# Altium PCB PCB1.PcbDoc (part 1 of 2)
Units mm, origin at the board's own origin, x right, y up, seen from the top; angles counter-clockwise.
Board outline 61.72 x 101.6 mm, 2 copper layers (Top Layer, Bottom Layer); 108 components, 60 nets, 357 pads, 84 vias.
Unrouted connection lines stored in the file: 20.
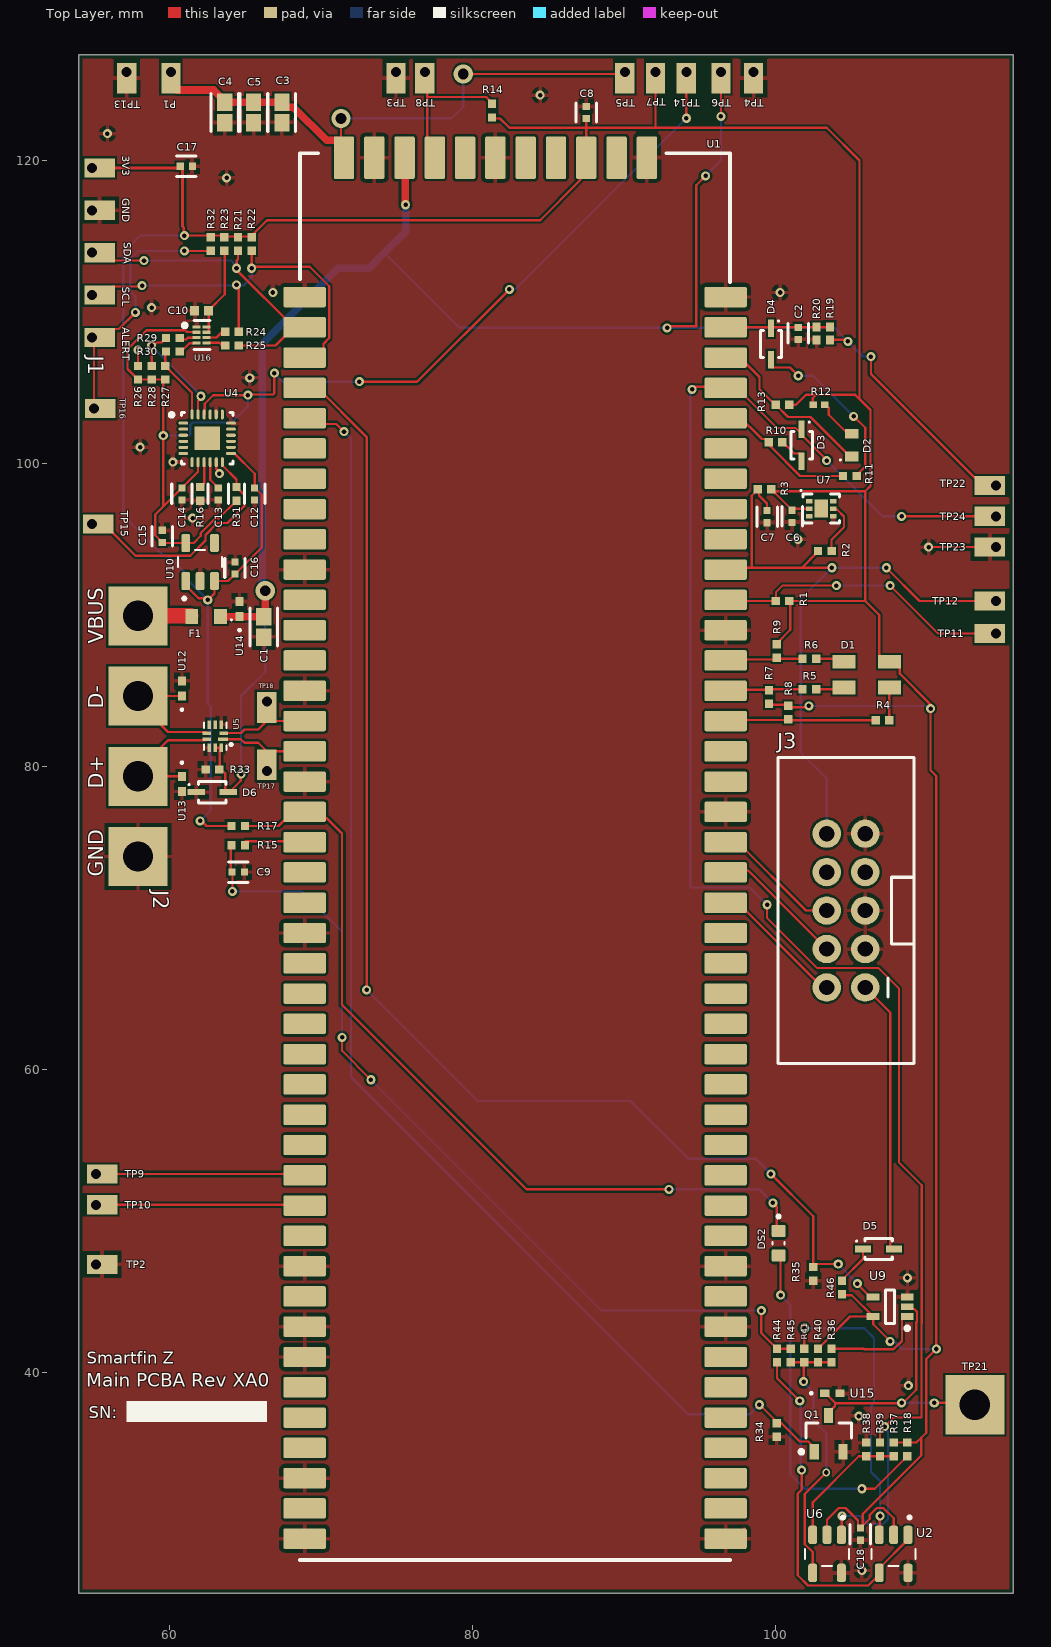
[diagram p0: Top Layer view]
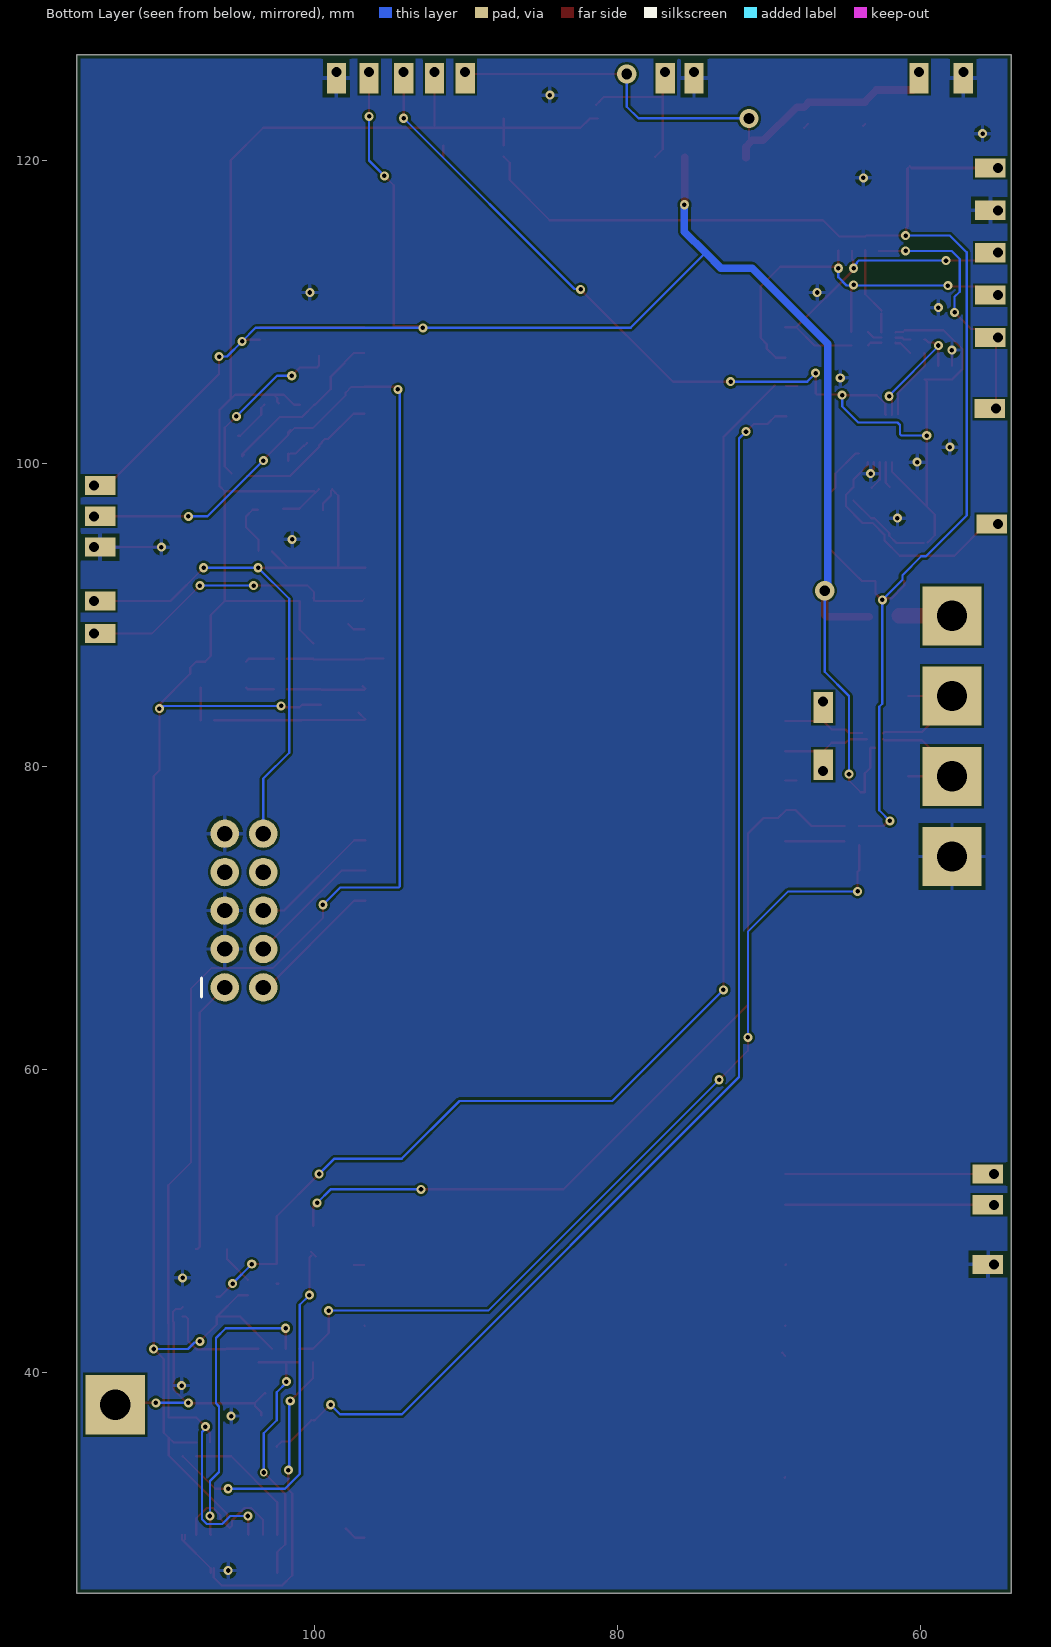
[diagram p1: Bottom Layer view, seen from below]

## Layer stack, top to bottom
Top Solder: solder mask 0.0102, Solder Resist, Dk 3.5
Top Layer: signal copper 0.0356
Dielectric 1: dielectric 0.32, FR-4, Dk 4.8
Bottom Layer: signal copper 0.0356
Bottom Solder: solder mask 0.0102, Solder Resist, Dk 3.5

## Board outline
53.975,25.4 115.697,25.4 115.697,127 53.975,127

## Design rules (kind name [scope] priority, off if disabled: settings)
BoardOutlineClearance [All] p1: gap=0.254 ignorepadtopadclearanceinfootprint=FALSE except(0: Arc-SplitContinuation Track-SplitContinuation SMDPad-SplitContinuation THPad-SplitContinuation Via-SplitContinuation Fill-SplitContinuation Poly-SplitContinuation Region-SplitContinuation Text-SplitContinuation)
Clearance [All] p1: gap=0.154 ignorepadtopadclearanceinfootprint=TRUE except(0.2: Arc-Text Track-Text SMDPad-Text THPad-Text Via-Text Fill-Text Fill-Hole Poly-Text Poly-Hole Region-Text Region-Hole Text-Text Text-Hole)
DiffPairsRouting DiffPair_DataDiffPairsRouting [InDifferentialPair ('USB_DATA')] p1: maxlimit=0.1 minlimit=0.06 mostfreqgap=0.08 toplayer_minwidth=0.06 toplayer_maxwidth=0.15 toplayer_prefwidth=0.15 bottomlayer_minwidth=0.06 bottomlayer_maxwidth=0.15 bottomlayer_prefwidth=0.15 maxuncoupledlength=0.1
DiffPairsRouting [All] p2: maxlimit=0.254 minlimit=0.254 mostfreqgap=0.254 toplayer_minwidth=0.05 toplayer_maxwidth=0.381 toplayer_prefwidth=0.15 bottomlayer_minwidth=0.05 bottomlayer_maxwidth=0.381 bottomlayer_prefwidth=0.15 maxuncoupledlength=12.7
MatchedLengths DiffPair_DataMatchedLengths [InDifferentialPair ('USB_DATA')] p1: tolerance=0.1 checknetsindiffpair=FALSE checkdiffpairvsdiffpair=TRUE checkxsignals=TRUE checkothers=TRUE
MinimumSolderMaskSliver [All] p1: minsoldermaskwidth=0.127
PlaneClearance [All] p1: clearance=2
PolygonConnect [All] p1: connectstyle=Relief reliefconductorwidth=0.254 reliefentries=4 polygonreliefangle="90 Angle" airgapwidth=0.254
RoutingVias [All] p1: holewidth=0.3 width=0.6 viastyle="Through Hole" minholewidth=0.3 minwidth=0.6 maxholewidth=0.4 maxwidth=0.6
SignalStimulus "Schematic Signal Stimulus_3" [InNet('DATA_P')] p1: kind=1 level=1 starttime=0.000 stoptime=2.083n periodtime=4.167n
SignalStimulus "Schematic Signal Stimulus_2" [InNet('USB_DATA_P')] p2: kind=1 level=1 starttime=0.000 stoptime=2.083n periodtime=4.167n
SignalStimulus "Schematic Signal Stimulus_1" [InNet('DATA_N')] p3: kind=1 level=1 starttime=0.000 stoptime=2.083n periodtime=4.167n
SignalStimulus "Schematic Signal Stimulus" [InNet('USB_DATA_N')] p4: kind=1 level=1 starttime=0.000 stoptime=2.083n periodtime=4.167n
SilkToSilkClearance [All] p1: silktosilkclearance=0.127
SilkToSolderMaskClearance [IsPad] p1: minsilkscreentomaskgap=0.127 clearancetoexposedcopper=TRUE
SolderMaskExpansion [All] p1: expansion=0.102 istentingtop=FALSE
SupplyNets "Schematic Supply Nets_4" [InNet('VBUS')] p1: voltage=5.000
SupplyNets "Schematic Supply Nets_3" [InNet('VBUS_CONN')] p2: voltage=5.000
SupplyNets "Schematic Supply Nets_2" [InNet('LIPO')] p3: voltage=3.700
SupplyNets "Schematic Supply Nets_1" [InNet('3V3')] p4: voltage=3.300
SupplyNets "Schematic Supply Nets" [InNet('1V8_VDDIO')] p5: voltage=1.800
Width LIPO_WIDTH [InNet('LIPO')] p1: maxlimit=0.5 minlimit=0.05 preferedwidth=0.5 minimp=50.000000 maximp=50.000000 favimp=50.000000
Width VBUS_WIDTH [InNet('VBUS')] p2: maxlimit=0.5 minlimit=0.05 preferedwidth=0.5 minimp=50.000000 maximp=50.000000 favimp=50.000000
Width VBUS_CONN_WIDTH [InNet('VBUS_CONN')] p3: maxlimit=1 minlimit=0.05 preferedwidth=0.5 minimp=50.000000 maximp=50.000000 favimp=50.000000
Width "Signal Width" [All] p4: maxlimit=0.2 minlimit=0.05 preferedwidth=0.15
25 further rules are at their usual default settings.

## Classes and differential pairs
net class POWER: 1V8_VDDIO 3V3 GND LIPO VBUS VBUS_CONN
component class "U_Wet Dry Sensor": C18 M1 M2 M3 M4 M5 Q1 R34 R35 R36 R37 R38 R39 R40 R41 R44 R45 TP21 U2 U6 U9 U15
component class U_USB: D6 F1 J2 R33 TP17 TP18 U5 U12 U13 U14
component class "U_Temp - Button": C17 J1 R32 TP16
component class U_Motion: C10 C12 C13 C14 C15 C16 R16 R21 R22 R23 R24 R25 R26 R27 R28 R29 R30 R31 TP14 TP15 U4 U10 U16
component class U_Control: C1 C2 C3 C4 C5 C6 C7 C8 C9 D1 D2 D3 D4 D5 DS2 GNd J3 P1 R1 R2 R3 R4 R5 R6 R7 R8 R9 R10 R11 R12 R13 R14 R15 R17 R18 R19 R20 R46 TP2 TP3 TP4 TP5 TP6 TP7 TP8 TP9 TP10 TP11 TP12 TP13 TP22 TP23 TP24 U1 U7 WATer
differential pair USB_DATA: +USB_DATA_P -USB_DATA_N
differential pair DATA: +DATA_P -DATA_N

## Components (designator, comment, footprint, x,y, rotation, side; value= is the part's Value field where it differs from the comment)
C1 "CC0603MRX5R5BB226" FP-CC0603-DC-IPC_B 66.2,89.224 r270 top value=22uF
C2 "cc0402krx5r6bb105" FP-CC0402-IPC_C 101.5,108.6 r270 top value=1uF
C3 "CC0603MRX5R5BB226" FP-CC0603-DC-IPC_B 67.4,123.2 r270 top value=22uF
C4 "CC0603MRX5R5BB226" FP-CC0603-DC-IPC_B 63.627,123.19 r270 top value=22uF
C5 "CC0603MRX5R5BB226" FP-CC0603-DC-IPC_B 65.532,123.19 r270 top value=22uF
C6 "cc0402krx5r6bb105" FP-CC0402-IPC_C 101.092,96.52 r270 top value=1uF
C7 "cc0402krx5r6bb105" FP-CC0402-IPC_C 99.441,96.499 r90 top value=1uF
C8 "cc0402krx5r6bb105" FP-CC0402-IPC_C 87.503,123.19 r270 top value=1uF
C9 "cc0402krx5r6bb105" FP-CC0402-IPC_C 64.516,73.025 r180 top value=1uF
C10 "CC0402KRX7R9BB101" CAPC1005X06N 62.1,110.1 r180 top value=100pF
C12 "cc0402krx5r6bb105" FP-CC0402-IPC_C 65.6,98 r270 top value=1uF
C13 "cc0402krx5r6bb105" FP-CC0402-IPC_C 63.2,98 r270 top value=1uF
C14 "cc0402krx5r6bb105" FP-CC0402-IPC_C 60.8,98 r90 top value=1uF
C15 "cc0402krx5r6bb105" FP-CC0402-IPC_C 59.5,95.2 r270 top value=1uF
C16 "cc0402krx5r6bb105" FP-CC0402-IPC_C 64.3,93.1 r270 top value=1uF
C17 "cc0402krx5r6bb105" FP-CC0402-IPC_C 61.087,119.634 r180 top value=1uF
C18 "cc0402krx5r6bb105" FP-CC0402-IPC_C 105.6,29.3 r90 top value=1uF
D1 "QBLP677AD-RGB2" "New footprint 1"#1 103.721,87.417 r0 top
D2 "APT1608MGC" SODFL160X75-2N 105.029,101.219 r90 top
D3 "BAT43XV2-1" SODFL250X75-2N 101.727,101.219 r270 top
D4 "BAT43XV2-1" SODFL250X75-2N 99.7,107.9 r270 top
D5 "B5817WS" SODFL250X135-2N 106.807,48.133 r0 top
D6 "DDZ5V6ASF-7" SODFL250X75-2N 62.8,78.3 r0 top
DS2 "LTST-C193KRKT-5A" LEDC1608X45N 100.203,48.514 r270 top
F1 "MF-FSML125/8-2" CAF-50P85X165-2N 62.4,89.9 r180 top
J1 "Temp Sensor Contacts" "Temp Sensor-Footprint-1" 54.864,108.331 r90 top
J2 "USB Charger-Header" "New footprint 1"#2 57.9,74.05 r90 top
J3 "ARM-JTAG-SWD" ARM-JTAG-10-SWD-IDC 104.648,70.485 r180 top
P1 "Test Point" "New footprint 1"#3 60.071,125.857 r90 top
Q1 "BSS138" SOT95P237X111-3N 103.505,35.941 r90 top
R1 "RC0402FR-0710KL" RESC1005X04N#1 100.457,90.932 r0 top value=10kR
R2 "RC0402JR-070RL" RESC1005X04N#1 103.251,94.234 r180 top value=0R
R3 "RC0402FR-0710KL" RESC1005X04N#1 99.271,98.298 r0 top value=10kR
R4 "RC0402FR-07300RL" RESC1005X04N#1 107.061,83.058 r0 top value=300R
R5 "RC0402FR-07280RL" RESC1005X04N#1 102.235,85.09 r0 top value=280R
R6 "RC0402FR-07220R" RESC1005X04N#1 102.235,87.122 r0 top value=220R
R7 "RC0402FR-0710KL" RESC1005X04N#1 100.838,83.566 r90 top value=10kR
R8 "RC0402FR-0710KL" RESC1005X04N#1 99.568,84.582 r270 top value=10kR
R9 "RC0402FR-0710KL" RESC1005X04N#1 100.076,87.63 r90 top value=10kR
R10 "RC0402JR-070RL" RESC1005X04N#1 100,101.4 r180 top value=0R
R11 "RC0402JR-070RL" RESC1005X04N#1 104.902,99.187 r180 top value=0R
R12 "47R" RESC1005X40X25LL05T10 102.87,103.886 r180 top
R13 "RC0402FR-0710KL" RESC1005X04N#1 100.457,103.886 r0 top value=10kR
R14 "RC0402FR-0710KL" RESC1005X04N#1 81.28,123.309 r270 top value=10kR
R15 "RC0402JR-070RL" RESC1005X04N#1 64.516,74.803 r180 top value=0R
R16 "RC0402JR-070RL" RESC1005X04N#1 62,98 r90 top value=0R
R17 "RC0402FR-0710KL" RESC1005X04N#1 64.516,76.073 r180 top value=10kR
R18 "RC0402FR-07120RL" RESC1005X04N#1 108.7,34.9 r90 top value=120R
R19 "RC0402FR-072K2L" RESC1005X04N#2 103.6,108.6 r90 top value=2.2kR
R20 "RC0402FR-073K3L" RESC1005X04N#2 102.7,108.6 r90 top value=3.3kR
R21 "RC0402FR-0710KL" RESC1005X04N#1 64.5,114.5 r90 top value=10kR
R22 "RC0402FR-0710KL" RESC1005X04N#1 65.4,114.5 r90 top value=10kR
R23 "RC0402JR-07200KL" RESC1005X04N#1 63.6,114.5 r90 top value=200kR
R24 "RC0402JR-070RL" RESC1005X04N#1 64.1,108.7 r180 top value=0R
R25 "RC0402JR-070RL" RESC1005X04N#1 64.1,107.8 r180 top value=0R
R26 "RC0402JR-07200KL" RESC1005X04N#1 57.9,106 r270 top value=200kR
R27 "RC0402FR-0710KL" RESC1005X04N#1 59.7,106 r270 top value=10kR
R28 "RC0402FR-0710KL" RESC1005X04N#1 58.8,106 r270 top value=10kR
R29 "RC0402JR-070RL" RESC1005X04N#1 60.2,108.3 r180 top value=0R
R30 "RC0402JR-070RL" RESC1005X04N#1 60.2,107.4 r180 top value=0R
R31 "RC0402FR-0710KL" RESC1005X04N#1 64.4,98 r270 top value=10kR
R32 "RC0402FR-0710KL" RESC1005X04N#1 62.7,114.5 r90 top value=10kR
R33 "RC0402FR-0710KL" RESC1005X04N#1 62.812,79.8 r0 top value=10kR
R34 "RC0402FR-0710KL" RESC1005X04N#1 100.076,36.18 r90 top value=10kR
R35 "RC0402FR-0710KL" RESC1005X04N#1 102.489,46.497 r90 top value=10kR
R36 "RC0402FR-07330RL" RESC1005X04N#1 103.7,41.1 r90 top value=330R
R37 "RC0402FR-0710KL" RESC1005X04N#1 107.8,34.9 r90 top value=10kR
R38 "RC0402FR-0710KL" RESC1005X04N#1 106,34.9 r90 top value=10kR
R39 "RC0402FR-07100KL" RESC1005X04N#1 106.9,34.9 r270 top value=100kR
R40 "RC0402FR-07100KL" RESC1005X04N#1 102.8,41.1 r270 top value=100kR
R41 "RC0402JR-070RL" RESC1005X04N#1 101.9,41.1 r90 top value=0R
R44 "RC0402JR-070RL" RESC1005X04N#1 100.1,41.1 r90 top value=0R
R45 "RC0402JR-070RL" RESC1005X04N#1 101,41.1 r90 top value=0R
R46 "RC0402FR-0710KL" RESC1005X04N#1 104.394,45.593 r90 top value=10kR
TP2 "Test Point" "New footprint 1"#3 55.118,47.117 r180 top
TP3 "Test Point" "New footprint 1"#3 74.93,125.857 r90 top
TP4 "Test Point" "New footprint 1"#3 98.552,125.857 r90 top
TP5 "Test Point" "New footprint 1"#3 90.043,125.857 r90 top
TP6 "Test Point" "New footprint 1"#3 96.393,125.857 r90 top
TP7 "Test Point" "New footprint 1"#3 92.075,125.857 r90 top
TP8 "Test Point" "New footprint 1"#3 76.835,125.857 r90 top
TP9 "Test Point" "New footprint 1"#3 55.118,53.086 r180 top
TP10 "Test Point" "New footprint 1"#3 55.118,51.054 r180 top
TP11 "Test Point" "New footprint 1"#3 114.554,88.773 r0 top
TP12 "Test Point" "New footprint 1"#3 114.554,90.932 r0 top
TP13 "Test Point" "New footprint 1"#3 57.15,125.857 r90 top
TP14 "Test Point" "New footprint 1"#3 94.107,125.857 r90 top
TP15 "Test Point" "New footprint 1"#3 54.864,96.012 r180 top
TP16 "Test Point" "New footprint 1"#3 54.991,103.632 r180 top
TP17 "Test Point" "New footprint 1"#3 66.4,79.7 r270 top
TP18 "Test Point" "New footprint 1"#3 66.4,84.3 r90 top
TP21 "USB Test Pad" "New footprint 1"#4 113.157,37.846 r0 top
TP22 "Test Point" "New footprint 1"#3 114.554,98.552 r0 top
TP23 "Test Point" "New footprint 1"#3 114.554,94.488 r0 top
TP24 "Test Point" "New footprint 1"#3 114.554,96.52 r0 top
U1 "T404X" "New footprint 1"#5 82.8,68 r0 top
U2 "LMC7215IM5X/NOPB" SOT95P280X145-5N 107.8,28 r270 top
U4 "ICM-20948" TDK-QFN-24_L 62.463,101.673 r0 top
U5 "FSUSB42UMX" IC_FSUSB42UMX 63,82 r180 top
U6 "LMC7215IM5X/NOPB" SOT95P280X145-5N 103.4,28 r270 top
U7 "MLX90248ELD-EBA-000-RE" SON50P150X40_HS-7N 103.022,97.028 r0 top
U9 "TS5A4595DCKR" SOT65P210X110-5N 107.569,44.323 r180 top
U10 "LP5907MFX-1.8/NOPB" SOT95P280X145-5N 62,93.5 r90 top
U12 "TPD1E1B04DPYR" DIO_TPD1E05U06DPYR 60.8,85.15 r90 top
U13 "TPD1E1B04DPYR" DIO_TPD1E05U06DPYR 60.8,78.85 r270 top
U14 "TPD1E10B06DPYT" DIO_TPD1E05U06DPYR 64.6,90.4 r90 top
U15 "TPD1E1B04DPYR" DIO_TPD1E05U06DPYR 103.751,38.608 r0 top
U16 "PCA9306DQER" FP-DQE0008A-MFG 62.1,108.5 r0 top

## Footprints (in the part's own frame and the unit in brackets; to place one, negate y for a bottom-side part, rotate by r counter-clockwise, add the part's x,y. Pads: shape width x height; smd on the part's side, far side on the other; paste and mask are expansions set on the pad)
ARM-JTAG-10-SWD-IDC [mil]
  round 74 hole 40: GND@1(-50,100) GND@2(-50,0) GND@3(-50,-200) KEY(-50,-100) nRESET(50,-200) TCK(50,100) TDI(50,-100) TDO(50,0) TMS(50,200) VCC(-50,200)
  silkscreen extent -177,-398 177,398
CAF-50P85X165-2N [mm] "Chip Array, Flat, 2-Leads, Pitch 0.50mm,  Body 0.85x1.65mm,  IPC Medium Density"
  rect 0.85x1 smd: 1(-0.95,0) 2(0.95,0)
  silkscreen extent -1.71,0.16 -1.61,0.26, body extent -0.92,-0.53 0.92,0.53, height 0.7
CAPC1005X06N [mm] "Chip Capacitor, 2-Leads, Body 1.00x0.50mm, IPC Medium Density"
  rect 0.6x0.62 smd mask+0.086: 1(-0.46,0) 2(0.46,0)
  body extent -0.53,-0.28 0.53,0.27, height 0.55
DIO_TPD1E05U06DPYR [mm]
  rect 0.6x0.5 smd: 1(-0.5,0) 2(0.5,0)
  silkscreen extent -1.47,-0.08 -1.33,0.07
FP-CC0402-IPC_C [mm]
  rect 0.468x0.472 smd paste+0 mask+0: 1(-0.402,0) 2(0.402,0)
  silkscreen extent -0.64,-0.67 0.64,0.67, body extent -0.74,-0.38 0.74,0.38, height 0.25
FP-CC0603-DC-IPC_B [mm]
  rect 1.155x1.006 smd paste+0 mask+0: 1(-0.676,0) 2(0.676,0)
  silkscreen extent -1.25,-0.9 1.25,0.9, body extent -1.5,-0.75 1.5,0.75, height 0.25
FP-DQE0008A-MFG [mm]
  rect 0.53x0.2 smd paste-1000 mask+0: 1(-0.335,0.525) 2(-0.335,0.175) 3(-0.335,-0.175) 4(-0.335,-0.525) 5(0.335,-0.525) 6(0.335,-0.175) 7(0.335,0.175) 8(0.335,0.525)
  silkscreen extent -1.25,-0.95 0.55,0.95, body extent -0.7,-0.82 0.7,0.82, height 0.25
IC_FSUSB42UMX [mm]
  rect 0.663x0.225 smd: 1(-0.519,0.2)
  rect 0.563x0.225 smd: 2(-0.569,-0.2) 6(0.569,-0.2) 7(0.569,0.2)
  rect 0.225x0.563 smd: 3(-0.4,-0.768) 4(0,-0.768) 5(0.4,-0.768) 8(0.4,0.768) 9(0,0.768) 10(-0.4,0.768)
  silkscreen extent -1.12,-0.9 0.75,0.9
LEDC1608X45N [mm]
  rrect25% 0.81x0.93 smd: A(0.81,0) C(-0.81,0)
  silkscreen extent -1.86,-0.4 0.09,0.4, body extent -0.8,-0.4 0.8,0.4, height 0.35
"New footprint 1"#1 [mm]
  rect 1.5x0.9 smd: B(3.8,-2.2) COM(3.8,-0.5) G(0.8,-2.2) R(0.8,-0.5)
"New footprint 1"#2 [mm]
  rect 3.9x3.9 hole 2: 1(0,0) 2(5.3,0) 3(10.6,0) 4(15.9,0)
"New footprint 1"#3 [mm]
  rect 2.023x1.27 hole 0.66 copper offset -0.406,0: 1(0,0)
"New footprint 1"#4 [mm]
  rect 3.9x3.9 hole 2: 1(0,0)
"New footprint 1"#5 [mm]
  rrect15% 2.8x1.35 smd: 1(13.9,-39) 2(13.9,-37) 3(13.9,-35) 4(13.9,-33) 5(13.9,-31) 6(13.9,-29) 7(13.9,-27) 8(13.9,-25) 9(13.9,-23) 10(13.9,-21) 11(13.9,-19) 12(13.9,-17) 13(13.9,-15) 14(13.9,-13) 15(13.9,-11) 16(13.9,-9) 17(13.9,-7) 18(13.9,-5) 19(13.9,-3) 20(13.9,-1) 21(13.9,1) 22(13.9,3) 23(13.9,5) 24(13.9,7) 25(13.9,9) 26(13.9,11) 27(13.9,13) 28(13.9,15) 29(13.9,17) 30(13.9,19) 31(13.9,21) 32(13.9,23) 33(13.9,25) 34(13.9,27) 35(13.9,29) 36(13.9,31) 37(13.9,33) 38(13.9,35) 39(13.9,37) 40(13.9,39) 41(13.9,41) 42(13.9,43) 54(-13.9,43) 55(-13.9,41) 56(-13.9,39) 57(-13.9,37) 58(-13.9,35) 59(-13.9,33) 60(-13.9,31) 61(-13.9,29) 62(-13.9,27) 63(-13.9,25) 64(-13.9,23) 65(-13.9,21) 66(-13.9,19) 67(-13.9,17) 68(-13.9,15) 69(-13.9,13) 70(-13.9,11) 71(-13.9,9) 72(-13.9,7) 73(-13.9,5) 74(-13.9,3) 75(-13.9,1) 76(-13.9,-1) 77(-13.9,-3) 78(-13.9,-5) 79(-13.9,-7) 80(-13.9,-9) 81(-13.9,-11) 82(-13.9,-13) 83(-13.9,-15) 84(-13.9,-17) 85(-13.9,-19) 86(-13.9,-21) 87(-13.9,-23) 88(-13.9,-25) 89(-13.9,-27) 90(-13.9,-29) 91(-13.9,-31) 92(-13.9,-33) 93(-13.9,-35) 94(-13.9,-37) 95(-13.9,-39)
  rrect15% 1.35x2.8 smd: 43(8.7,52.2) 44(6.7,52.2) 45(4.7,52.2) 46(2.7,52.2) 47(0.7,52.2) 48(-1.3,52.2) 49(-3.3,52.2) 50(-5.3,52.2) 51(-7.3,52.2) 52(-9.3,52.2) 53(-11.3,52.2)
  silkscreen extent -14.2,-40.4 14.2,52.5
RESC1005X04N#1 [mm] "Chip Resistor, 2-Leads, Body 1.00x0.50mm, IPC Medium Density"
  rect 0.55x0.55 smd: 1(-0.45,0) 2(0.45,0)
  body extent -0.53,-0.27 0.53,0.28, height 0.4
RESC1005X04N#2 [mm] "Chip Resistor, 2-Leads, Body 1.00x0.50mm, IPC Medium Density"
  rect 0.6x0.55 smd mask+0.061: 1(-0.425,0) 2(0.425,0)
  body extent -0.53,-0.27 0.53,0.28, height 0.4
RESC1005X40X25LL05T10 [mm] "Chip Resistor, 2-Leads, Body 1.00x0.50mm, IPC High Density"
  rect 0.5x0.45 smd: 1(-0.375,0) 2(0.375,0)
  body extent -0.53,-0.27 0.53,0.28, height 0.4
SODFL160X75-2N [mm] "SODFL, 2-Leads, Body 0.80x1.60mm, IPC Medium Density"
  rect 0.65x0.9 smd: 1(-0.75,0) 2(0.75,0)
  silkscreen extent -1.02,0.7 -0.93,0.8, body extent -0.63,-0.42 0.63,0.42, height 0.75
SODFL250X75-2N [mm] "SODFL, 2-Leads, Body 1.25x2.50mm, IPC Medium Density"
  rect 1.15x0.4 smd: 1(-1.05,0) 2(1.05,0)
  silkscreen extent -1.57,-0.7 0.9,0.7, body extent -0.9,-0.67 0.9,0.67, height 0.75
SODFL250X135-2N [mm] "SODFL, 2-Leads, Body 1.25x2.50mm, IPC Medium Density"
  rect 1.05x0.45 smd: 1(-1.025,0) 2(1.025,0)
  silkscreen extent -1.5,-0.7 0.9,0.7, body extent -0.9,-0.67 0.9,0.67, height 1.35
SON50P150X40_HS-7N [mm] "SON, 6-Leads, Body 2.00x1.50mm, Pitch 0.50mm, Thermal Pad 1.08x0.13mm, IPC Medium Density"
  rect 0.43x0.3 smd: 1(-0.787,0.5) 3(-0.787,-0.5) 6(0.787,0.5) GND(0.787,-0.5) OUT(0.787,0) VDD(-0.787,0)
  rect 0.9x1.2 smd: 7(0,0)
  silkscreen extent -1.4,-0.95 1.2,1.25, body extent -1.05,-0.8 1.05,0.8, height 0.4
SOT65P210X110-5N [mm] "SOT23, 5-Leads, Body 2.00x2.10mm, Pitch 0.65mm, IPC Medium Density"
  rect 0.85x0.45 smd: 1(-1.125,0.65) 2(-1.125,0) 3(-1.125,-0.65) 4(1.125,-0.65) 5(1.125,0.65)
  silkscreen extent -1.25,-1.1 0.3,1.55, body extent -0.7,-1.07 0.7,1.08, height 1.1
SOT95P237X111-3N [mm] "SOT23, 3-Leads, Body 2.92x2.37mm, Pitch 0.95mm, IPC Medium Density"
  rect 1x0.6 smd: 1(-1.2,0.95) 2(-1.2,-0.95) 3(1.2,0)
  silkscreen extent -1.32,-1.5 0.7,1.92, body extent -0.7,-1.52 0.7,1.52, height 1.11
SOT95P280X145-5N [mm]
  rrect50% 1.21x0.59 smd: 1(-1.255,0.95) 2(-1.255,0) 3(-1.255,-0.95) 4(1.255,-0.95) 5(1.255,0.95)
  silkscreen extent -2.51,-1.45 0.8,1.45, body extent -1.4,-1.45 1.4,1.45, height 1.45
TDK-QFN-24_L [mm] "QFN, 24-Leads, Body 3.10x3.10mm, Pitch 0.40mm, Thermal Pad 1.70x1.54mm, IPC High Density"
  oval 0.65x0.2 smd: 1(-1.575,1) 2(-1.575,0.6) 3(-1.575,0.2) 4(-1.575,-0.2) 5(-1.575,-0.6) 6(-1.575,-1) 13(1.575,-1) 14(1.575,-0.6) 15(1.575,-0.2) 16(1.575,0.2) 17(1.575,0.6) 18(1.575,1)
  oval 0.2x0.65 smd: 7(-1,-1.575) 8(-0.6,-1.575) 9(-0.2,-1.575) 10(0.2,-1.575) 11(0.6,-1.575) 12(1,-1.575) 19(1,1.575) 20(0.6,1.575) 21(0.2,1.575) 22(-0.2,1.575) 23(-0.6,1.575) 24(-1,1.575)
  rect 1.7x1.54 smd: 25(0,0)
  silkscreen extent -2.47,-1.7 1.7,1.7, body extent -1.55,-1.55 1.55,1.55, height 1.05
"Temp Sensor-Footprint-1" [mm]
  rect 1.27x2.023 hole 0.66 copper offset 0,-0.5: 1(0,0) 2(2.8,0) 3(5.6,0) 4(8.4,0) 5(11.2,0)

## Part data
C1 C3 C4 C5: library part YAGEO-CC0603MRX5R5BB226-1, "Ceramic Capacitor, Multilayer, Ceramic, 6.3V, 20% +Tol, 20% -Tol, X5R, 15% TC, 22uF, Surface Mount, 0603"
C2 C6 C7 C8 C9 C12 C13 C14 C15 C16 C17 C18: library part YAGEO-CC0402KRX5R6BB105-1, "Ceramic Capacitor, Multilayer, Ceramic, 10V, 10% +Tol, 10% -Tol, X5R, 15% TC, 1uF, Surface Mount, 0402"
C10: library part YAGEO-CC0402KRX7R9BB101-3, "Ceramic Capacitor, Multilayer, Ceramic, 50V, 10% +Tol, 10% -Tol, X7R, 15% TC, 0.0001uF, Surface Mount, 0402"
D1: library part CMP-006-000001-13, "Led Rgb, 3528 PLCC4 Dome Lens, 2", ComponentLink1Description=https://www.digikey.com/en/products/detail/qt-brightek-qtb/QBLP677AD-RGB2/10401015
D2: library part CMP-006-000000-5, "Single Color LED, Mega Green, Water Clear, 1.2mm"
D3 D4: library part CMP-004-123445-3, "Rectifier Diode, Schottky, 1 Phase, 1 Element, 0.2A, 30V V(RRM), Silicon", Forward Voltage=330mV, Max Operating Temperature=125°C, Max Output current=200mA, Max Power Dissipation=200mW, Non-rep Pk Forward Current-Max=4A, Package Body Material=Plastic, Package Shape=Rectangular, Package Style="SMALL OUTLINEMeter", Rep Pk Reverse Voltage-Max=30V, Diode Element Material=SILICON, Diode Type=RECTIFIER, JESD-30 Code=R-PDSO-F2, Moisture Sensitivity Level=1, Number of Elements=1, Pins=2, Qualification Status="Not Qualified", Reach SVHC Compliant=Yes, Reverse Recovery Time-Max=0.005us, RoHS Compliant=Yes, Surface Mount=Yes, Technology=SCHOTTKY, Terminal Form=Flat, Terminal Position=DUAL
D5: library part CMP-004-000013-6, "Rectifier Diode Schottky 20V 1A 2-Pin SOD-323 T/R"
D6: library part CMP-004-000006-2, "Zener Diode, 5.42V V(Z), 2.5%, 0.5W, Silicon"
DS2: library part CMP-004-000003-1, "Red 631nm LED Indication - Discrete 2V 0603 (1608 Metric)", Package="0603 Lite-On Inc.", Check_prices=https://www.snapeda.com/parts/LTST-C193KRKT-5A/Lite-On+Inc./view-part/?ref=eda, Component Type=Standard, Design Item ID=LTST-C193KRKT-5A, Digi-Key_Part_Number=160-1830-2-ND, MF="Lite-On Inc.", MP=LTST-C193KRKT-5A, Pin Count=2, Purchase-URL=https://pricing.snapeda.com/search/part/LTST-C193KRKT-5A/?ref=eda, SnapEDA_Link=https://www.snapeda.com/parts/LTST-C193KRKT-5A/Lite-On+Inc./view-part/?ref=snap, Source=LTST-C193KRKT-5A.SchLib
F1: library part CMP-002-000035-2, Pin Count=2
J1: library part CMP-002-000044-2, "Smartfin Temperature Sensor Port"
J2: library part CMP-002-000046-2, "Smartfin USB Charger Header"
J3: library part CMP-046-000000-2, "DEBUG ADAPTER FOR ARM-USB-TINY-H", Package=None, Availability="In Stock", Check_prices=https://www.snapeda.com/parts/ARM-JTAG-SWD/Olimex+LTD/view-part/?ref=eda, Component Type=Standard, Design Item ID=ARM-JTAG-SWD, MF="Olimex LTD", MP=ARM-JTAG-SWD, Pin Count=10, Price=None, Purchase-URL=https://pricing.snapeda.com/search/part/ARM-JTAG-SWD/?ref=eda, SnapEDA_Link=https://www.snapeda.com/parts/ARM-JTAG-SWD/Olimex+LTD/view-part/?ref=snap, Source=ARM-JTAG-SWD.SchLib
P1 TP2 TP3 TP4 TP5 TP6 TP7 TP8 TP9 TP10 TP11 TP12 TP13 TP14 TP15 TP16 TP17 TP18 TP22 TP23 TP24: library part CMP-00002-11
Q1: library part CMP-002-000027-5, "N-Channel 50V 220mA (Ta) 360mW (Ta) Surface Mount SOT-23-3", Package="SOT-23 ON Semiconductor", Availability=Good, Check_prices=https://www.snapeda.com/parts/BSS138/ON%20Semiconductor/view-part/4794929/?ref=eda, Component Type=Standard, Design Item ID=BSS138, MF="ON Semiconductor", MP=BSS138, Pin Count=3, Price=None, Purchase-URL=https://pricing.snapeda.com/search/part/BSS138/?ref=eda, Reach SVHC Compliant=Yes, RoHS Compliant=Yes, SnapEDA_Link=https://www.snapeda.com/parts/BSS138/ON%20Semiconductor/view-part/4794929/?ref=snap, Source=BSS138.SchLib
R1 R3 R7 R8 R9 R13 R14 R17 R21 R22 R27 R28 R31 R32 R33 R34 R35 R37 R38 R46: library part CMP-002-000053-2, "Fixed Resistor, Metal Glaze/thick Film, 0.0625W, 10000ohm, 50V, 1% +/-Tol, 100ppm/Cel, Surface Mount, 0402"
R2 R10 R11 R15 R16 R24 R25 R29 R30 R41 R44 R45: library part YAGEO-RC0402JR-070RL-1, "Metal Glaze/thick Film, 0.0625W, 0ohm, Surface Mount, 0402"
R4: library part YAGEO-RC0402FR-07300RL-2, "Fixed Resistor, Metal Glaze/thick Film, 0.0625W, 300ohm, 50V, 1% +/-Tol, 100ppm/Cel, Surface Mount, 0402"
R5: library part YAGEO-RC0402FR-07280RL-2, "Fixed Resistor, Metal Glaze/thick Film, 0.0625W, 280ohm, 50V, 1% +/-Tol, 100ppm/Cel, Surface Mount, 0402"
R6: library part YAGEO-RC0402FR-07220R-2, "Fixed Resistor, Metal Glaze/thick Film, 0.0625W, 220ohm, 50V, 1% +/-Tol, 100ppm/Cel, Surface Mount, 0402"
R12: library part CMP-2002-07703-1, Manufacturer="Yageo / Phycomp", Part Number=RC0402FR-0747RL
R18: library part CMP-002-000051-2, "Fixed Resistor, Metal Glaze/thick Film, 0.0625W, 120ohm, 50V, 1% +/-Tol, 100ppm/Cel, Surface Mount, 0402"
R19: library part YAGEO-RC0402FR-072K2L-3, "Fixed Resistor, Metal Glaze/thick Film, 0.0625W, 2200ohm, 50V, 1% +/-Tol, 100ppm/Cel, Surface Mount, 0402", Case/Package=0402, Max Operating Temperature=155°C, Min Operating Temperature=-55°C, Package Height=0.35mm, Package Length=1mm, Package Shape=Rectangular, Package Style=SMTMeter, Package Width=0.5mm, Power=62.5mW, Rated Temperature=70°C, Resistor Type="FIXED RESISTOR", Temperature Coefficient=100ppm/°C, Tolerance=1%, Working Voltage=50V, Additional Feature="LASER TRIMMABLE", Construction=Chip, JESD-609 Code=e3, Mounting Technology="Surface Mount", Packaging="Tape and Reel", Pins=2, Reach SVHC Compliant=Yes, RoHS Compliant=Yes, Technology="METAL GLAZE/THICK FILM", Terminal Finish=Nickel, Termination=Wraparound
R20: library part YAGEO-RC0402FR-073K3L-3, "Fixed Resistor, Metal Glaze/thick Film, 0.0625W, 3300ohm, 50V, 1% +/-Tol, 100ppm/Cel, Surface Mount, 0402", Case/Package=0402, Max Operating Temperature=155°C, Min Operating Temperature=-55°C, Package Height=0.35mm, Package Length=1mm, Package Shape=Rectangular, Package Style=SMTMeter, Package Width=0.5mm, Power=62.5mW, Rated Temperature=70°C, Resistor Type="FIXED RESISTOR", Temperature Coefficient=100ppm/°C, Tolerance=1%, Working Voltage=50V, Additional Feature="LASER TRIMMABLE", Construction=Chip, JESD-609 Code=e3, Mounting Technology="Surface Mount", Packaging="Tape and Reel", Pins=2, Reach SVHC Compliant=Yes, RoHS Compliant=Yes, Technology="METAL GLAZE/THICK FILM", Terminal Finish=Nickel, Termination=Wraparound
R23 R26: library part CMP-002-000016-2, "Res Thick Film 0402 200K Ohm 5% 0.063W(1/16W) ?100ppm/C Molded SMD Paper T/R", Package=None, Availability=Unavailable, Component Type=Standard, Design Item ID=RC0402JR-07200KL, MF="{'manufacturer': u'YAGEO'}", MP=RC0402JR-07200KL, Pin Count=2, Price=None, Source=RC0402JR-07200KL.SchLib
R36: library part YAGEO-RC0402FR-07330RL-1, "Fixed Resistor, Metal Glaze/thick Film, 0.0625W, 330ohm, 50V, 1% +/-Tol, 100ppm/Cel, Surface Mount, 0402"
R39 R40: library part YAGEO-RC0402FR-07100KL-1, "Fixed Resistor, Metal Glaze/thick Film, 0.0625W, 100000ohm, 50V, 1% +/-Tol, 100ppm/Cel, Surface Mount, 0402"
TP21: library part CMP-002-000049-1
U1: library part CMP-002-000045-13, "Tracker System on a Module", ComponentLink1URL=https://docs.particle.io/reference/datasheets/tracker/tracker-som-datasheet/
U2 U6: library part CMP-002-000012-5, "Low power, low voltage comparator with push-pull output", Package="SOT-23-5 Texas Instruments", Availability="In Stock", Check_prices=https://www.snapeda.com/parts/LMC7215IM5X/NOPB/Texas+Instruments/view-part/?ref=eda, Component Type=Standard, Design Item ID=LMC7215IM5X/NOPB, MF="Texas Instruments", MP=LMC7215IM5X/NOPB, Pin Count=5, Price=None, Purchase-URL=https://pricing.snapeda.com/search?q=LMC7215IM5X/NOPB&ref=eda, SnapEDA_Link=https://www.snapeda.com/parts/LMC7215IM5X/NOPB/Texas+Instruments/view-part/?ref=snap, Source=LMC7215IM5X_NOPB.SchLib
U4: library part CMP-002-000006-5, "9-Axis MEMS MotionTracking Device Gyroscope/Accelerometer/Compass Digital Motion Processor 24-Pin QFN", Package=None, Availability=Unavailable, Component Type=Standard, Design Item ID=ICM-20948, MP=ICM-20948, Pin Count=24, Price=None, Source=ICM-20948.SchLib
U5: library part CMP-002-000013-3, "USB Switch IC 1 Channel 10-UMLP _1.8x1.4_", Package="UFQFN-10 ON Semiconductor", Availability=Unavailable, Component Type=Standard, Design Item ID=FSUSB42UMX, MF="ON Semiconductor", MP=FSUSB42UMX, Pin Count=10, Price=None, SnapEDA_Link=https://www.snapeda.com/parts/FSUSB42UMX/ON%20Semiconductor/view-part/1672388/?ref=snap, Source=SnapEDAsch.SchLib
U7: library part CMP-002-000033-5, "Micropower & Omnipolar Hall Switch", Package=UTQFN-6L, Component Type=Switch, Pin Count=6
U9: library part CMP-002-000032-5, Package=SOT23, Component Type=Switch, Pin Count=5
U10: library part CMP-002-000011-4, "250-mA, low-noise, high-PSRR, low-IQ, ultra-low-dropout voltage regulator with low-IQ and enable 5-SOT-23 -40 to 125", Case/Package=LSSOP, Dropout Voltage1-Max=250mV, Input Voltage Absolute-Max=6V, Max Supply Voltage=5.5V, Min Input Voltage=2.2V, Operating Temperature, TJ-Max=125°C, Operating Temperature, TJ-Min=-40°C, Output Current1-Max=250mA, Output Voltage1-Max=1.836V, Output Voltage1-Min=1.764V, Output Voltage1-Nom=1.8V, Package=None, Package Body Material=Plastic, Package Equivalence Code=TSOP5/6,.11,37, Package Shape=Rectangular, Package Style="SMALL OUTLINE, LOW PROFILE, SHRINK PITCHMeter", Peak Reflow Temperature (Cel)=260°C, Voltage Tolerance-Max=2%, Adjustability=FIXED, Availability=Unavailable, Channels=1, Component Type=Standard, Design Item ID=LP5907MFX-1.8/NOPB, Height - Seated (Max)=1.45mm, JESD-30 Code=R-PDSO-G5, JESD-609 Code=e3, Length=2.9mm, Moisture Sensitivity Level=1, MP=LP5907MFX-1.8/NOPB, Number of Outputs=1, Packaging="Tape and Reel", Pin Count=5, Pins=5, Price=None, Qualification Status="Not Qualified", Reach SVHC Compliant=Yes, Regulator Type="FIXED POSITIVE SINGLE OUTPUT LDO REGULATOR", RoHS Compliant=Yes, Source=LP5907MFX-1.8_NOPB.SchLib, Surface Mount=Yes, Technology=CMOS, Terminal Finish=Tin, Terminal Form="Gull Wing", Terminal Pitch=0.95mm, Terminal Position=DUAL, Width=1.6mm
U12 U13 U15: library part CMP-004-000009-3, "1-channel ESD protection diode with low dynamic resistance and low clamping -Voltage 2-X1SON -40 to 125", Package="X1SON-2 Texas Instruments", Availability=Warning, Component Type=Standard, Design Item ID=TPD1E1B04DPYR, MF="Texas Instruments", Mouser-Purchase-URL=https://snapeda.com/shop?store=Mouser&id=616615, MP=TPD1E1B04DPYR, Pin Count=2, Price=None, SnapEDA_Link=https://www.snapeda.com/parts/TPD1E1B04DPYR/Texas%20Instruments/view-part/616615/?ref=snap, Source=TPD1E1B04DPYR.SchLib, Texas_Instruments-Purchase-URL=https://snapeda.com/shop?store=Texas+Instruments&id=616615
U14: library part CMP-004-000000-4, "Single-channel ESD in 0402 package with 10pF capacitance and 6-V breakdown 2-X1SON -40 to 125", Package="X1SON-2 Texas Instruments", Check_prices=https://www.snapeda.com/parts/TPD1E10B06DPYT/Texas%20Instruments/view-part/231963/?ref=eda, Component Type=Standard, Design Item ID=TPD1E10B06DPYT, Digi-Key_Part_Number=296-41842-1-ND, MF="Texas Instruments", MP=TPD1E10B06DPYT, Pin Count=2, Purchase-URL=https://pricing.snapeda.com/search/part/TPD1E10B06DPYT/?ref=eda, SnapEDA_Link=https://www.snapeda.com/parts/TPD1E10B06DPYT/Texas%20Instruments/view-part/231963/?ref=snap, Source=TPD1E10B06DPYT.SchLib
U16: library part CMP-010-000000-10, "2-bit bidirectional I2C bus and SMBus voltage-level shifter 8-X2SON -40 to 85", Case/Package=VSON, Max Operating Temperature=85°C, Max Supply Voltage=5V, Min Operating Temperature=-40°C, Min Supply Voltage=0V, Package="X2SON-8 Texas Instruments", Package Body Material=Plastic, Package Shape=Rectangular, Package Style="SMALL OUTLINE, VERY THIN PROFILEMeter", Peak Reflow Temperature (Cel)=260°C, Temperature Grade=INDUSTRIAL, Availability=Warning, Channels=2, Component Type=Standard, Design Item ID=PCA9306DQER, Height - Seated (Max)=0.4mm, Interface IC Type="INTERFACE CIRCUIT", JESD-30 Code=R-PDSO-N8, JESD-609 Code=e4, Length=1.4mm, MF="Texas Instruments", Moisture Sensitivity Level=1, Mouser-Purchase-URL=https://snapeda.com/shop?store=Mouser&id=39064, MP=PCA9306DQER, Pin Count=8, Pins=8, Price=None, Qualification Status="Not Qualified", Reach SVHC Compliant=Yes, RoHS Compliant=Yes, SnapEDA_Link=https://www.snapeda.com/parts/PCA9306DQER/Texas%20Instruments/view-part/39064/?ref=snap, Source=PCA9306DQER.SchLib, Surface Mount=Yes, Terminal Finish=Nickel, Terminal Form="No Lead", Terminal Pitch=0.35mm, Terminal Position=DUAL, Texas_Instruments-Purchase-URL=https://snapeda.com/shop?store=Texas+Instruments&id=39064, Width=1mm

## Via types
v1: diameter 0.6, hole 0.3, Top Layer to Bottom Layer, 80 vias
v2: diameter 1.27, hole 0.711, Top Layer to Bottom Layer, 3 vias
v3: diameter 0.5, hole 0.3, Top Layer to Bottom Layer, 1 vias

## Nets (pads, with @x,y where several pads share a name; then routed paths per layer and width w, separated by ;. In a path a pad name is that pad's centre, name@x,y a point inside that pad or via, vN(x,y) a via of type N, cw(c..) or ccw(c..) an arc to the next point about the centre after c; other vN are vias at no path point)
1V8_VDDIO: C14.2 C15.2 R26.2 R27.2 R28.2 R31.2 TP14.1 U4.8 U4.22 U10.5 U16.2 | length 82.3
  Top Layer w0.15: C15.2 59.498,94.798 59.035,95.261 59.035,96.639 59.563,97.167 ; 59.743,94.755 U10.5 61.57,94.755 62.045,95.23 62.045,95.418 63.011,96.384 63.234,96.384 R31.2 ; U16.2@61.635,108.675 61.614,108.696 61.128,108.696 61.02,108.804 58.456,108.804 57.2,107.548 57.2,106.25 R26.2 R28.2 R27.2 59.563,105.413 v1(59.563,101.854) 59.563,97.167 ; U4.8 61.863,99.463 60.802,98.402 C14.2 60.798,98.402 59.563,97.167 ; U4.22@62.263,103.218 62.298,103.253 62.298,103.954 62.865,104.521 v1(65.151,104.521) 65.19,104.56 66.812,104.56 66.9,104.648 v1(66.9,105.975) ; v1(72.517,105.41) 76.327,105.41 v1(82.423,111.506) ; v1(94.107,122.809) TP14.1
  Bottom Layer w0.15: v1(59.563,101.854) 61.25,101.854 61.338,101.942 61.338,102.557 61.499,102.718 64.096,102.718 65.151,103.773 v1(65.151,104.521) ; v1(66.9,105.975) 67.465,105.41 v1(72.517,105.41) ; v1(82.423,111.506) 82.454,111.537 82.835,111.537 v1(94.107,122.809)
3V3: C6.1 C8.2 C12.1 C16.2 C17.2 C18.2 D1.COM J1.5 R1.2 R3.2 R7.2 R8.2 R9.2 R12.2 R13.2 R14.2 R17.2 R18.2 R21.2 R22.2 R23.2 R32.2 R37.2 R40.1 R46.1 TP7.1 U1.45 U2.2 U4.13 U6.2 U7.VDD U9.5 U10.1 U10.3 | length 283.9
  Top Layer w0.15: C17.2@60.582,119.531 C17.2 C17.2@60.844,119.475 ; 60.844,115.662 60.919,115.587 60.919,115.103 v1(60.96,115.062) 62.734,115.062 62.738,115.066 63.565,115.066 63.627,115.004 64.516,115.004 65.339,115.004 66.413,116.078 84.455,116.078 87.109,118.732 87.109,119.877 U1.45@87.501,120.269 ; U10.1 61.05,91.95 61.9,91.1 v1@62.5,91.1 ; v1(62,76.4) 62.088,76.4 62.415,76.073 R17.2 ; v1(62.5,91) v1@62.5,91.1 ; U4.13 64.263,100.673 65.6,99.336 C12.1 65.602,98.402 66.065,97.939 66.065,94.461 64.302,92.698 C16.2 64.298,92.698 63.845,92.245 U10.3 62.95,91.415 62.721,91.186 62.586,91.186 v1@62.5,91.1 ; R14.2@81.28,122.797 81.805,122.797 82.427,122.174 87.503,122.174 ; U1.45@87.503,121.031 87.503,122.174 ; C8.2 87.503,122.174 ; TP7.1@92.075,125.603 92.075,122.174 ; R8.2@99.568,84.07 100.83,84.07 100.984,83.916 102.116,83.916 v1(102.2,84) ; R3.2 99.921,98.098 99.923,98.098 99.996,98.171 105.918,98.171 ; R3.2@99.973,98.048 100.931,97.091 100.931,97.081 100.994,97.018 C6.1@101.003,97.018 ; R9.2@100.076,88.142 100.088,88.142 100.969,89.023 100.969,90.932 105.918,90.932 ; R13.2@100.969,103.886 101.346,103.886 102.009,104.549 102.683,104.549 ; C6.1@101.013,97.028 U7.VDD@102.083,97.028 ; R12.2@102.362,103.981 102.457,104.077 102.457,104.323 102.683,104.549 ; R40.1 104.923,43.673 U9.5 ; U6.2 103.4,30.248 104.181,31.029 104.619,31.029 105.439,30.209 105.439,29.861 105.598,29.702 C18.2 105.602,29.702 C18.2@105.761,29.861 ; R46.1@104.394,45.081 105.036,45.081 U9.5 ; v1(107.569,42.037) 106.444,43.162 U9.5 ; U2.2 107.8,30.348 107.119,31.029 106.681,31.029 106.221,30.569 106.221,30.321 C18.2@105.761,29.861 ; R37.2 R18.2 109.299,35.35 109.624,35.675 ; 87.503,122.174 92.075,122.174 ; 92.075,122.174 103.378,122.174 105.537,120.015 105.537,104.267 ; 102.683,104.549 105.255,104.549 105.537,104.267 ; 105.537,104.267 106.268,103.536 106.268,98.521 105.918,98.171 ; C18.2@105.761,29.861 105.761,30.637 109.624,34.5 109.624,35.675 ; 105.918,90.932 106.846,90.004 106.846,87.292 107.221,86.917 D1.COM 107.821,86.917 108.196,86.542 108.196,86.131 110.236,84.091 v1(110.236,83.82) 110.236,79.756 110.617,79.375 v1(110.617,41.529) 109.949,40.861 109.949,36 109.624,35.675 ; 105.918,90.932 105.918,98.171
  Top Layer w0.2: J1.5 C17.2@60.582,119.531 ; 60.844,115.662 C17.2@60.844,119.475
  Bottom Layer w0.15: v1(60.96,115.062) 58.039,115.062 56.927,113.95 56.927,96.573 59.62,93.88 59.92,93.88 61.167,92.633 61.167,92.333 v1(62.5,91) 62.5,84.139 62.7,83.939 62.7,77.1 v1(62,76.4) ; v1(102.2,84) 109.934,84 110.114,83.82 v1(110.236,83.82) ; v1(107.569,42.037) 107.655,41.951 107.922,41.951 108.344,41.529 v1(110.617,41.529)
ALERT: J1.1 R32.1 TP16.1 | length 18.1
  Top Layer w0.15: J1.1@55.486,108.331 J1.1 54.991,108.204 TP16.1 TP16.1@55.791,103.632 ; J1.1@55.74,108.325 56.3,108.885 56.628,108.885 v1(57.725,109.982) ; v1(60.96,114.046) 62.734,114.046 R32.1@62.738,114.042
  Bottom Layer w0.15: v1(57.725,109.982) 57.725,111.013 57.384,111.354 57.384,113.518 57.912,114.046 v1(60.96,114.046)
BLUE: D1.B R4.2 | length 2.2
  Top Layer w0.15: R4.2@107.506,83.058 107.506,85.202 D1.B
BLUE_PIO: R4.1 R7.1 U1.28 | length 10.5
  Top Layer w0.15: U1.28@96.647,83.125 U1.28@97.088,83.566 ; U1.28@96.701,83.069 100.823,83.069 100.838,83.054 104.217,83.054 104.221,83.058 R4.1@106.616,83.058
CHG_STAT: R14.1 TP8.1 U1.50 | length 10.5
  Top Layer w0.15: TP8.1 76.835,124.587 77.002,124.42 77.002,124.206 ; U1.50@77.501,120.269 77.002,120.768 77.002,124.206 ; R14.1@81.407,123.698 81.39,123.698 81.105,123.983 81.105,124 80.899,124.206 77.002,124.206
COM: R36.2 U9.1 | length 6.8
  Top Layer w0.15: R36.2 105.823,41.55 105.865,41.508 107.788,41.508 108.344,42.064 108.344,43.523 108.494,43.673 U9.1
DATA_N: TP18.1 U1.68 U5.2 | length 5.7
  Top Layer w0.15: U5.2@63.8,82.204 64.7,82.204 64.936,82.44 65.84,82.44 66.4,83 TP18.1@66.4,83.8 ; TP18.1@66.96,83 U1.68
DATA_P: TP17.1 U1.69 U5.1 | length 6
  Top Layer w0.15: U5.1 64.688,81.8 64.927,81.56 65.84,81.56 TP17.1@66.4,81 ; TP17.1@66.2,79.3 TP17.1@66.2,80.1 ; TP17.1@66.96,81 U1.69
GND: C1.2 C2.2 C3.2 C4.2 C5.2 C6.2 C7.1 C8.1 C9.1 C10.2 C12.2 C13.2 C14.1 C15.1 C16.1 C17.1 C18.1 D6.1 J1.4 J2.1 J3.GND@1 J3.GND@2 J3.GND@3 Q1.2 R16.1 R20.1 R26.1 R33.1 R34.1 R35.1 R38.2 TP2.1 TP3.1 TP4.1 TP13.1 TP23.1 U1.1 U1.8 U1.10 U1.25 U1.31 U1.42 U1.43 U1.48 U1.52 U1.54 U1.63 U1.67 U1.70 U1.75 U1.86 U1.88 U1.89 U1.93 U1.95 U2.5 U4.11 U4.18 U4.20 U5.3 U5.8 U6.5 U7.GND U9.3 U10.2 U12.2 U13.2 U14.2 U15.2 U16.1 | length 14.6
  Top Layer w0.15: TP2.1@54.864,47.117 TP2.1 ; J1.4@54.864,116.719 55.701,116.719 J1.4@56.261,116.159 ; R26.1 v1(57.9,107.5) ; U4.11 63.073,100.088 63.073,99.651 63.268,99.456 v1(63.268,99.334) ; C4.2@63.627,122.431 C4.2@63.754,122.304 ; v1@63.754,118.618 v1(63.754,118.872) ; C3.2@67.4,122.441 C3.2@67.657,122.184 ; U1.70@68.176,79.069 U1.70@68.901,79.069 ; U1.86@68.853,47.117 U1.86@68.901,47.069 ; U1.93@68.901,33.069 U1.93@68.95,33.02 ; U1.89@68.901,41.069 U1.89@69.107,41.275 ; U1.88@68.901,43.069 U1.88@68.917,43.053 ; U1.43@91.501,120.269 U1.43@91.501,120.994 ; U1.8@96.685,43.053 U1.8@96.701,43.069 ; U1.1@96.701,29.069 97.327,29.069 U1.1@97.925,29.667 ; U1.10@96.701,47.069 U1.10@97.426,47.069 ; U1.31@96.701,89.069 97.426,89.069 U1.31@97.765,89.408 ; R35.1@102.389,45.847 R35.1@102.489,45.847 ; v1@108.694,46.21 v1(108.712,46.228) ; v1(110.109,94.488) TP23.1 TP23.1@114.681,94.488
  other v1: 105.7,26.9 105.5,37.1 108.767,39.116 101.473,94.996 61.5,96.4 60.2,100.1 58.039,101.092 65.278,105.664 58.8,110.3 66.8,111.3 100.3,111.3 55.88,121.793 84.455,124.333
GREEN: D1.G R5.2 | length 1.9
  Top Layer w0.15: R5.2@102.68,85.09 104.394,85.09 D1.G
GREEN_PIO: R5.1 R8.1 U1.29 | length 5.4
  Top Layer w0.15: U1.29@96.647,85.125 U1.29@96.834,85.313 ; U1.29@96.701,85.069 99.543,85.069 99.568,85.094 101.786,85.094 R5.1@101.79,85.09
Hi_Z_Buffer: C9.2 R15.2 R44.2 R45.2 | length 58
  Top Layer w0.13: v1(71.374,62.103) 71.374,61.214 v1(73.279,59.309)
  Top Layer w0.15: R15.2@64.016,74.803 64.016,73.144 64.135,73.025 v1(64.135,71.755) ; v1(99.06,44.069) 99.06,42.59 R44.2 ; R44.2@100.1,41.545 100.105,41.55 R45.2
  Bottom Layer w0.13: v1(64.135,71.755) 68.707,71.755 71.374,69.088 v1(71.374,62.103) ; v1(73.279,59.309) 88.519,44.069 v1(99.06,44.069)
I2C_VREF2: C10.1 R23.1 U16.7 U16.8 | length 5.7
  Top Layer w0.15: C10.1@62.56,109.91 62.56,109.9 62.565,109.895 62.565,109.025 U16.7@62.565,108.675 ; C10.1 62.56,110.11 63.627,111.177 R23.1@63.627,114.104
IMU_INT: R31.1 TP15.1 U4.12 | length 16
  Top Layer w0.15: TP15.1 55.647,96.012 57.738,93.921 61.353,93.921 62.349,94.917 62.349,95.292 63.137,96.08 63.804,96.08 64.904,97.18 64.904,97.946 R31.1 64.4,98.95 63.487,99.863 63.463,99.887 U4.12
IMU_SCL: R28.1 R29.2 U4.23 | length 8.5
  Top Layer w0.15: R28.1 v1(58.8,107.8) 58.922,107.8 59.122,108 59.45,108 59.65,108.2 R29.2@59.75,108.2 ; U4.23@61.863,103.218 61.865,103.22 61.865,104.147 62.046,104.329 v1(62.046,104.451)
  Bottom Layer w0.15: v1(58.8,107.8) 58.8,107.748 62.046,104.502 v1(62.046,104.451)
IMU_SDA: R27.1 R30.2 U4.24 | length 4.8
  Top Layer w0.15: R30.2@59.75,107.3 59.7,107.25 R27.1 61.463,104.687 U4.24
LED: DS2.C R17.1 U1.71 | length 54.2
  Top Layer w0.15: R17.1 67.18,76.073 68.232,77.125 68.847,77.125 69.38,76.592 70.347,76.592 71.374,75.565 71.374,64.262 83.566,52.07 v1(92.964,52.07) ; v1@99.877,51.126 100.076,50.927 DS2.C@100.076,49.657
  Bottom Layer w0.15: v1(92.964,52.07) 98.933,52.07 v1(99.822,51.181)
LIPO: C3.1 C4.1 C5.1 P1.1 TP5.1 U1.53 | length 37.4
  Top Layer w0.15: U1.53@71.247,121.178 71.3,121.231 v2(71.3,122.8) ; v2(79.375,125.73) TP5.1@89.531,125.73
  Top Layer w0.5: P1.1 60.071,125.057 60.456,124.672 62.895,124.672 63.627,123.94 C4.1 C5.1 65.537,123.871 67.395,123.871 C3.1 67.4,123.801 67.653,123.548 68.152,123.548 70.35,121.35 71.075,121.35 71.247,121.178 71.5,120.925 U1.53 ; TP5.1@89.662,125.861 TP5.1@89.662,126.111
  Bottom Layer w0.15: v2(71.3,122.8) 78.604,122.8 79.375,123.571 v2(79.375,125.73)
MODE: R1.1 TP11.1 U1.32 | length 20.6
  Top Layer w0.07: U1.32@96.701,91.069 U1.32@96.838,90.932 ; R1.1@99.945,90.932 99.945,90.944 100.032,91.032 100.147,91.147 R1.1@100.16,91.147
  Top Layer w0.13: U1.32@96.838,90.932 R1.1@99.945,90.932 ; R1.1@100.032,90.932 100.032,91.032 100.032,91.523 100.457,91.948 v1(104.013,91.948) ; v1(107.569,91.948) 110.744,88.773 TP11.1@114.935,88.773
  Bottom Layer w0.13: v1(104.013,91.948) v1(107.569,91.948)
NetC13_1: C13.1 U4.10 | length 1.9
  Top Layer w0.15: U4.10 62.663,98.937 63.198,98.402 C13.1
NetD2_2: D2.2 R12.1 | length 2.9
  Top Layer w0.15: R12.1@103.295,103.886 103.32,103.886 103.52,103.686 103.52,103.226 104.904,101.842 D2.2@105.029,101.842
NetD3_2: D3.2 R10.1 | length 2.1
  Top Layer w0.15: R10.1@100.5,101.4 100.5,101.35 100.675,101.175 100.725,101.175 101.231,100.669 101.602,100.669 D3.2@101.727,100.544 ; D3.2 D3.2@101.727,100.544 ; D3.2@101.727,100.644 D3.2@101.727,100.544
NetD4_2: D4.2 R11.1 | length 11.8
  Top Layer w0.15: D4.2@99.7,107.136 D4.2 99.7,106.475 99.825,106.35 100.95,106.35 v1(101.5,105.8) ; v1(105.156,103.124) 105.918,102.362 105.918,99.803 R11.1@105.474,99.359
  Bottom Layer w0.15: v1(101.5,105.8) 102.48,105.8 v1(105.156,103.124)
NetD5_1: D5.1 R46.2 | length 2.6
  Top Layer w0.15: R46.2@104.394,46.105 104.406,46.105 105.782,47.481 D5.1
NetD5_2: D5.2 J3.VCC | length 18.1
  Top Layer w0.15: J3.VCC 107.569,63.754 107.569,48.283 107.719,48.133 D5.2
NetDS2_A: DS2.A R18.1 | length 24.2
  Top Layer w0.15: DS2.A@99.908,47.644 DS2.A@100.221,47.958 ; DS2.A 100.33,47.577 v1(100.33,45.085) ; v1(105.698,32.302) v1(105.698,32.302) 106.55,32.3 R18.1
  Bottom Layer w0.15: v1(100.33,45.085) 100.965,44.45 100.965,33.274 101.939,32.3 105.697,32.3 v1(105.698,32.302)
NetJ3_TCK: J3.TCK U1.23 | length 8.9
  Top Layer w0.15: U1.23@96.647,73.125 98.198,73.125 J3.TCK
NetJ3_TDO: J3.TDO U1.24 | length 8.7
  Top Layer w0.15: U1.24@96.647,75.125 97.372,75.125 102.012,70.485 J3.TDO
NetJ3_TMS: J3.TMS U1.22 | length 9.1
  Top Layer w0.15: U1.22@96.647,71.125 97.386,71.125 103.106,65.405 J3.TMS
NetR2_1: R2.1 U7.OUT | length 3.6
  Top Layer w0.15: R2.1@103.696,94.234 103.696,94.978 104.521,95.803 104.521,96.506 104.074,96.953 U7.OUT@103.732,96.953
NetR15_1: R15.1 U1.72 | length 3.9
  Top Layer w0.15: R15.1@65.016,75.057 65.028,75.069 U1.72@68.901,75.069
NetR16_2: R16.2 U4.9 | length 1.8
  Top Layer w0.15: R16.2 62.263,98.713 U4.9
NetR24_2: R24.2 U16.6 | length 1
  Top Layer w0.15: U16.6@62.565,108.325 63.075,108.325 R24.2@63.45,108.7
NetR25_2: R25.2 U16.5 | length 1
  Top Layer w0.15: U16.5@62.565,107.975 63.275,107.975 R25.2@63.45,107.8
NetR29_1: R29.1 U16.3 | length 1
  Top Layer w0.15: R29.1@60.65,108.2 61.086,108.2 61.19,108.304 61.614,108.304 U16.3@61.635,108.325
NetR30_1: R30.1 U16.4 | length 1.3
  Top Layer w0.15: R30.1@60.65,107.3 61.3,107.95 61.61,107.95 U16.4@61.635,107.975
NetR41_2: R41.2 U2.3 | length 19.6
  Top Layer w0.15: R41.2@101.9,41.545 R41.2@101.901,41.544 ; R41.2 v1(101.9,42.9) ; U2.3 106.875,29.28 106.875,30.475 v1(106.9,30.5)
  Bottom Layer w0.15: v1(101.9,42.9) 105.856,42.9 106.5,42.256 106.5,37.939 106.3,37.739 106.3,33.4 106.896,32.804 106.896,30.504 v1(106.9,30.5)
NetR44_1: R44.1 U2.1 U2.4 | length 24.8
  Top Layer w0.15: R44.1 100.1,39.6 v1(101.6,38.1) v1@101.6,38.187 ; v1(101.727,33.528) 101.727,32.245 101.473,31.991 101.473,26.585 102.147,25.911 106.126,25.911 106.65,26.435 U2.4@106.65,27.05 ; U2.4 106.85,27.05 108.75,28.95 U2.1 ; U2.1@108.55,28.95 U2.1@108.55,29.255
  Bottom Layer w0.15: v1(101.6,38.1) 101.663,38.036 101.663,33.591 v1(101.727,33.528)
NetTP9_1: TP9.1 U1.83 | length 14
  Top Layer w0.15: TP9.1@54.864,53.086 TP9.1 U1.83@68.901,53.086
NetTP10_1: TP10.1 U1.84 | length 13.8
  Top Layer w0.15: TP10.1 U1.84@68.901,51.054
NetU1_9: U1.9 U1.18 U1.19 U1.20 U1.21 U1.34 U1.35 U1.36 U1.37 U1.44 U1.59 U1.60 U1.61 U1.62 U1.76 U1.77 U1.78 U1.79 U1.80 U1.81 U1.82
nRESET: C7.2 J3.nRESET R2.2 R3.1 TP12.1 U1.33 | length 46.6
  Top Layer w0.15: U1.33@96.647,93.125 98.425,93.125 ; C7.2@99.439,96.901 99.439,97.361 98.914,97.886 98.914,98.205 R3.1 98.621,98.098 98.621,98.073 98.425,97.877 98.425,93.125 ; R2.2@102.806,94.234 102.806,94.189 101.742,93.125 ; v1(103.725,93.125) 101.742,93.125 ; v1(107.315,93.125) 109.508,90.932 TP12.1 TP12.1@114.681,90.932 ; 98.425,93.125 101.742,93.125
  Bottom Layer w0.15: J3.nRESET 103.378,79.2 101.671,80.907 101.671,91.071 v1(103.725,93.125) v1(107.315,93.125)
RED: D1.R R6.2 | length 1.9
  Top Layer w0.15: R6.2@102.667,87.122 104.316,87.122 D1.R
RED_PIO: R6.1 R9.1 U1.30 | length 6.3
  Top Layer w0.15: U1.30@95.451,87.125 U1.30@96.647,87.125 ; U1.30@96.701,87.069 100.027,87.069 100.076,87.118 100.08,87.122 R6.1@101.803,87.122
SCL: J1.2 R22.1 R24.1 U1.56 | length 26.5
  Top Layer w0.15: J1.2@55.753,111.246 56.198,111.691 58.097,111.691 v1(58.166,111.76) ; v1(64.4,111.8) 64.4,111.678 64.55,111.528 R24.1 ; v1(65.4,112.9) R22.1 ; v1@65.4,113 69.24,113 70.529,111.711 70.529,108.289 70.14,107.9 70.14,107.598 69.542,107 U1.56
  Bottom Layer w0.15: v1(58.166,111.76) 64.86,111.76 65.4,112.3 v1@65.4,113
SDA: J1.3 R21.1 R25.1 U1.55 | length 21.5
  Top Layer w0.15: J1.3@54.991,114.046 55.626,113.411 v1(58.293,113.411) ; R21.1 64.5,113.5 64.425,113.425 64.425,112.925 v1(64.4,112.9) 64.4,112.789 68.175,109.014 U1.55@68.175,109 ; R25.1 66.975,107.8 U1.55@68.175,109 ; U1.55 U1.55@68.175,109
  Bottom Layer w0.15: v1(58.293,113.411) 64.062,113.411 64.169,113.305 64.169,113.253 64.4,113.022 v1(64.4,112.9)
STAT_LED: D2.1 R13.1 U1.40 | length 11.6
  Top Layer w0.15: U1.40@96.7,107.3 97.411,107.3 98.009,106.702 98.009,106.636 98.933,105.712 98.933,104.91 R13.1@99.945,103.898 ; R13.1 100.82,103.073 102.3,103.073 104.779,100.594 104.779,100.467 D2.1@104.654,100.592
USB_DATA_N: J2.3 U5.6 U12.1 | length 9.2
  Top Layer w0.15: U12.1 57.5,84.65 59.875,82.275 62.357,82.275 U5.6
USB_DATA_P: J2.2 U5.7 U13.1 | length 9.2
  Top Layer w0.15: U13.1 57.5,79.35 59.875,81.725 62.357,81.725 U5.7
USB_PRESENCE: C2.1 D4.1 R19.2 R20.2 U1.41 | length 6.9
  Top Layer w0.15: U1.41 103.575,109 R19.2
VBUS: C1.1 D6.2 F1.1 R19.1 R33.2 TP6.1 TP22.1 U1.51 U5.9 U5.10 U14.1 | length 124.2
  Top Layer w0.15: U5.9 63.268,81.232 63.3,81.2 63.3,79.9 63.65,79.55 63.65,78.3 63.925,78.3 64.681,79.056 64.681,79.481 v1(64.7,79.5) ; C1.1 C1.1@66.3,90 ; v1@92.837,109.069 94.769,109.069 94.769,118.391 v1(95.377,118.999) ; v1(96.393,122.936) TP6.1 ; R19.1 104.65,108.175 104.748,108.077 v1(104.775,108.077) ; v1(106.299,107.061) 106.299,105.918 113.665,98.552 TP22.1 TP22.1@114.681,98.552
  Top Layer w0.5: F1.1 U14.1 C1.1 ; C1.1@66.3,90 v2(66.3,91.6) ; v1@75.533,117.126 U1.51@75.533,120.237
  Bottom Layer w0.15: v1(64.7,79.5) 64.7,84.659 66.3,86.259 v2(66.3,91.6) ; 74.168,113.919 79.121,108.966 v1(92.837,108.966) 103.886,108.966 v1(104.775,108.077) 105.774,107.078 106.282,107.078 v1(106.299,107.061) ; v1(95.377,118.999) 96.393,120.015 v1(96.393,122.936)
  Bottom Layer w0.5: v2@66.1,91.8 66.1,107.9 71.103,112.903 73.152,112.903 74.168,113.919 75.565,115.316 v1(75.565,117.094)
VBUS_CONN: F1.2 J2.4 | length 4
  Top Layer w0.15: F1.2@61.4,89.95 F1.2
  Top Layer w1: J2.4@57.5,89.95 F1.2@61.4,89.95
WATER: D3.1 R39.1 TP24.1 U1.39 U6.1 | length 117.9
  Top Layer w0.13: U1.39@96.701,105.069 97.564,105.069 97.94,104.693 97.94,104.509 100.088,102.361 101.31,102.361 D3.1@101.727,101.944 ; v1(99.441,70.866) 99.441,69.977 102.743,66.675 106.807,66.675 108.142,65.34 108.142,53.858 109.655,52.345
  Top Layer w0.15: v1(94.488,104.902) 94.655,105.069 U1.39@96.701,105.069 ; D3.1@101.602,102.219 101.727,102.094 101.727,101.944 101.727,101.894 v1@103.378,100.243 ; U6.1 104.375,29.28 104.375,30.475 v1(104.4,30.5) ; R39.1 106.9,35.978 107.2,36.278 v1(107.2,36.4) 107.8,37 109.645,37 109.645,43.22 109.655,43.23 109.655,52.345 ; v1(108.331,96.52) TP24.1 TP24.1@114.681,96.52
  Bottom Layer w0.15: v1(94.488,104.902) 94.361,104.775 94.361,72.097 94.449,72.009 98.298,72.009 v1(99.441,70.866) ; v1(103.378,100.203) 107.061,96.52 v1(108.331,96.52) ; v1(104.4,30.5) 105.556,30.5 106.085,29.971 107.119,29.971 107.429,30.281 107.429,36.049 107.2,36.278 v1(107.2,36.4) v1@107.229,36.371
WATER_COMP_MINUS: R36.1 R40.2 R41.1 R45.1 U6.4 | length 18.1
  Top Layer w0.15: R45.1 R41.1 ; v1(101.854,39.37) 101.854,40.604 R41.1 ; U6.4 102.45,28.118 101.926,28.642 101.926,31.945 v3(103.353,33.372) ; R36.1 R40.2 R41.1
  Bottom Layer w0.15: v1(101.854,39.37) 101.854,39.311 102.489,38.676 102.489,36.83 103.353,35.966 v3(103.353,33.372)
WATER_COMP_PLUS: R37.1 R38.1 R39.2 U6.3 | length 8.8
  Top Layer w0.15: U6.3 102.45,31.4 105.5,34.45 R38.1 R39.2 R37.1
WATER_DETECT_PAD: Q1.3 TP21.1 U9.2 U15.1 | length 19
  Top Layer w0.15: U15.1 103.301,38.608 103.926,37.983 103.926,37.941 ; Q1.3 103.505,37.341 103.926,37.762 103.926,37.941 ; U9.2@108.7,44.3 108.827,44.173 109.168,44.173 109.348,43.993 109.348,43.353 109.296,43.301 109.296,38.832 108.437,37.973 v1(108.331,37.973) 108.299,37.941 103.926,37.941 ; v1(110.478,37.973) TP21.1@113.665,37.973
  Bottom Layer w0.15: v1(108.331,37.973) v1(110.478,37.973)
WATER_EN: R35.2 U1.57 U9.4 | length 85.8
  Top Layer w0.15: U1.57@68.122,105.125 U1.57@68.847,105.125 ; U1.57@69.596,105.156 72.994,101.758 v1(72.994,65.247) ; v1(99.695,53.086) 102.489,50.292 102.489,47.147 102.499,47.137 v1(104.139,47.137) ; v1(105.41,45.847) 105.41,45.807 106.244,44.973 U9.4